# Altium PCB PCB1.PcbDoc
Units mm, origin at the board's own origin, x right, y up, seen from the top; angles counter-clockwise.
Board outline 39.37 x 36.83 mm, 4 copper layers (L1 (SIGNAL), L2 (GND), L3 (GND), L4 (SIGNAL)), stack 1.57 mm thick; 35 components, 27 nets, 174 pads, 86 vias.
Unrouted connection lines stored in the file: 5.
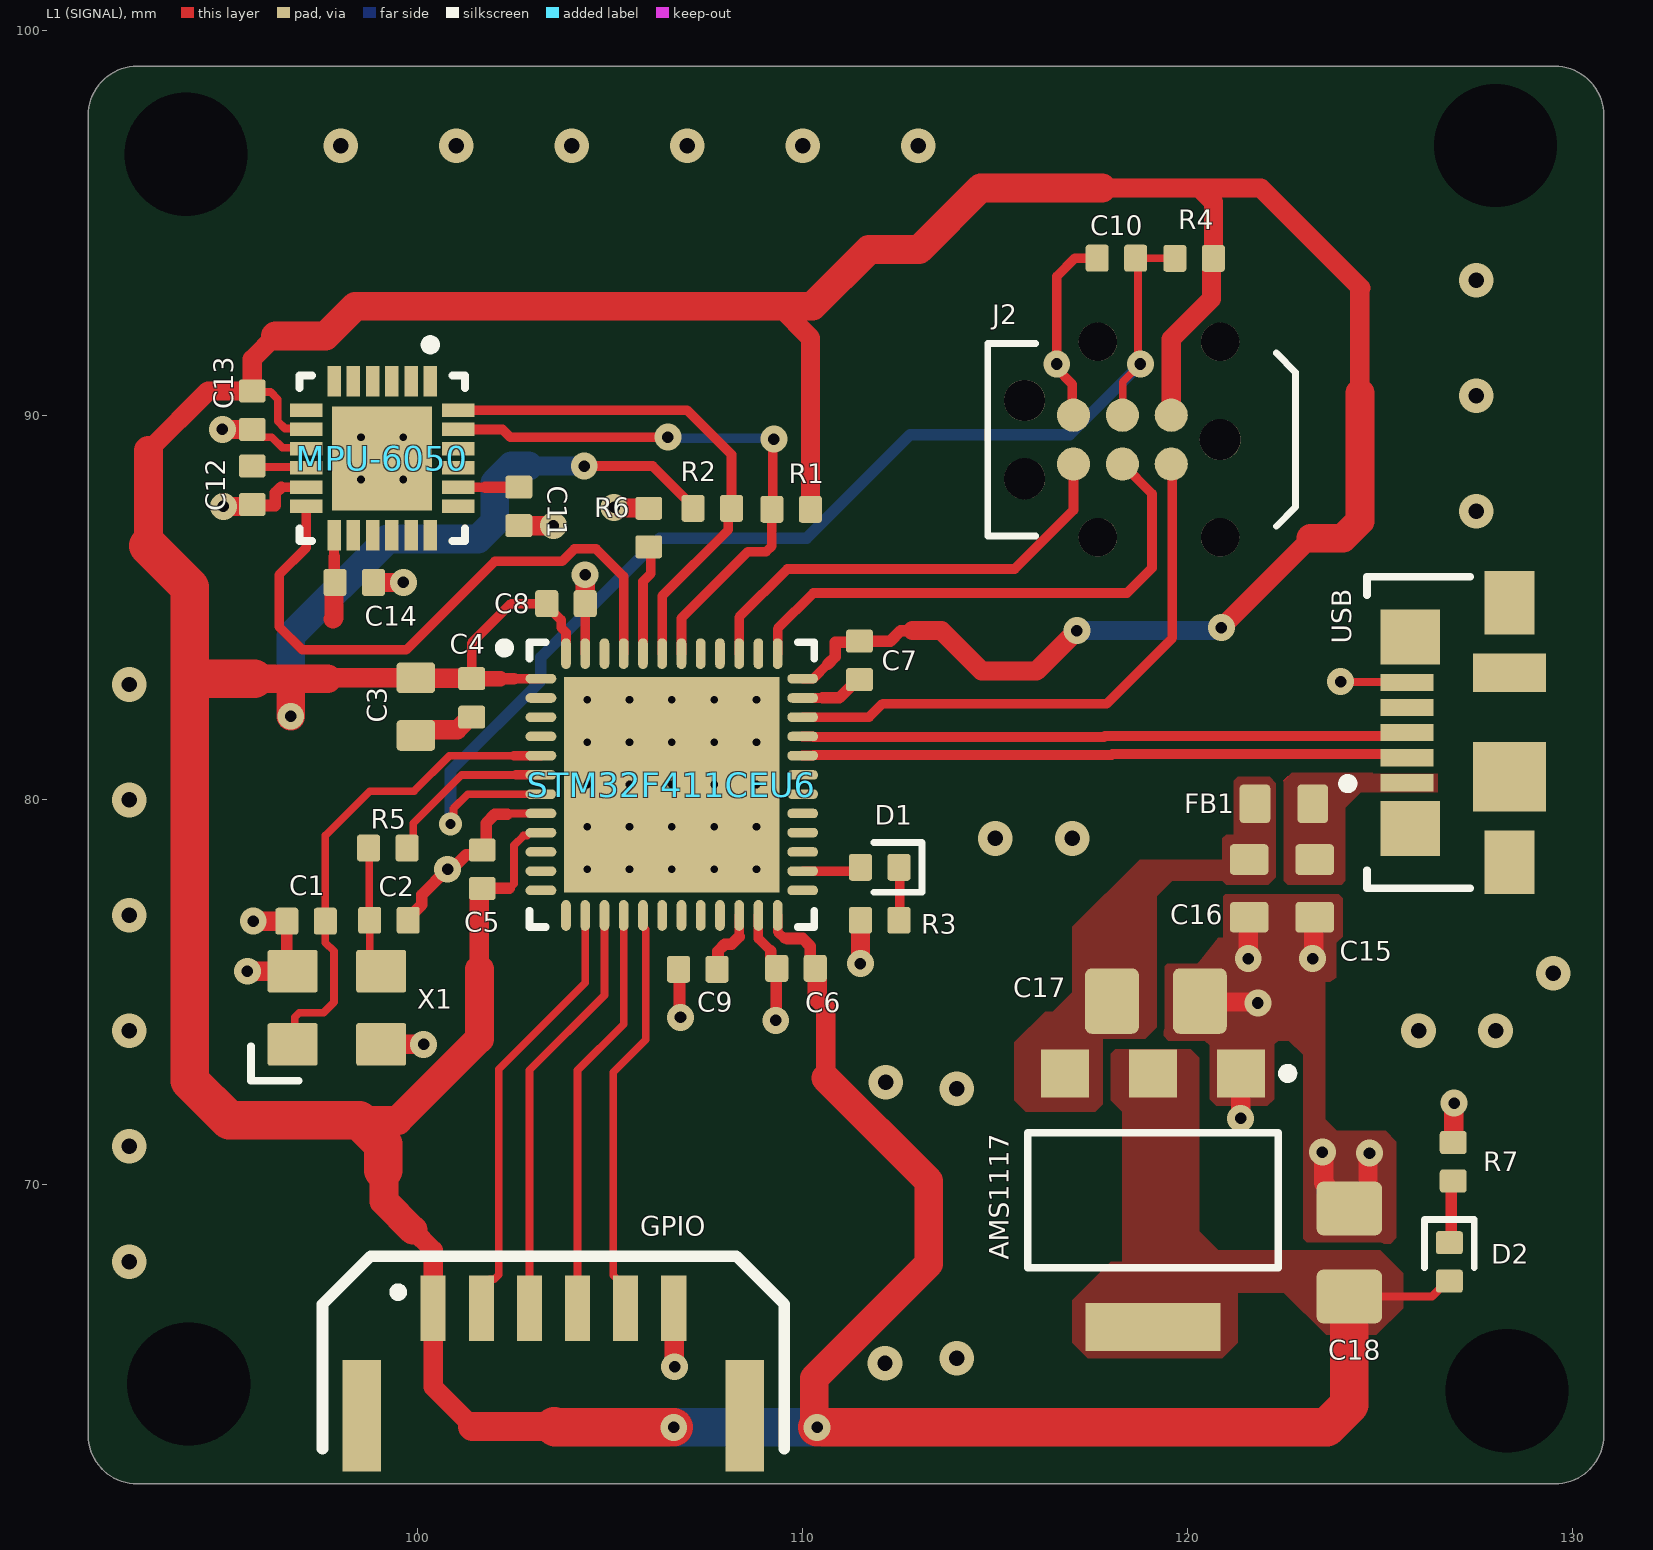
[diagram p0: L1 (SIGNAL) view]
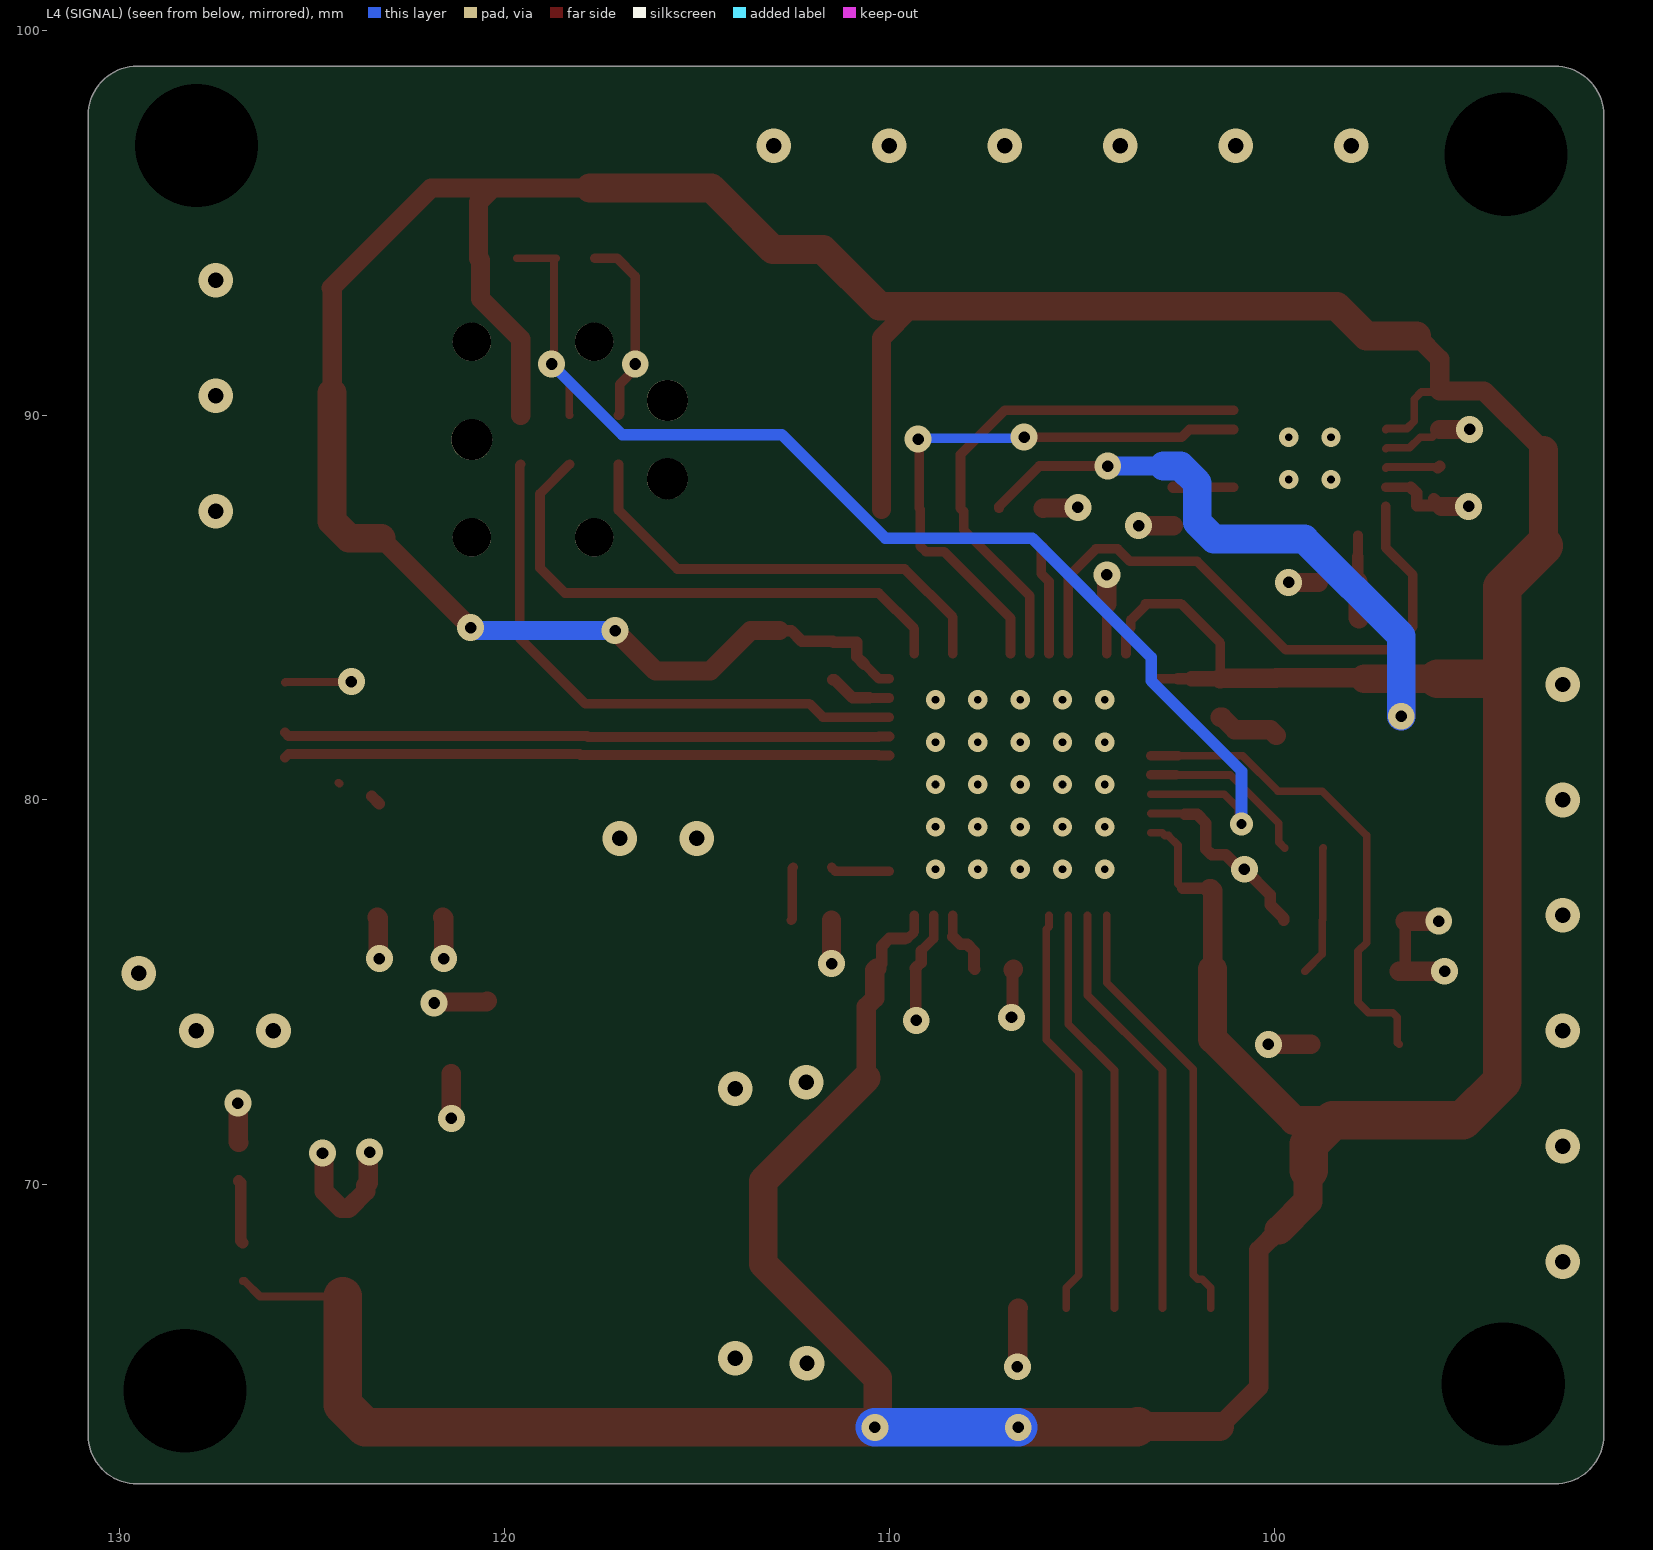
[diagram p1: L4 (SIGNAL) view, seen from below]
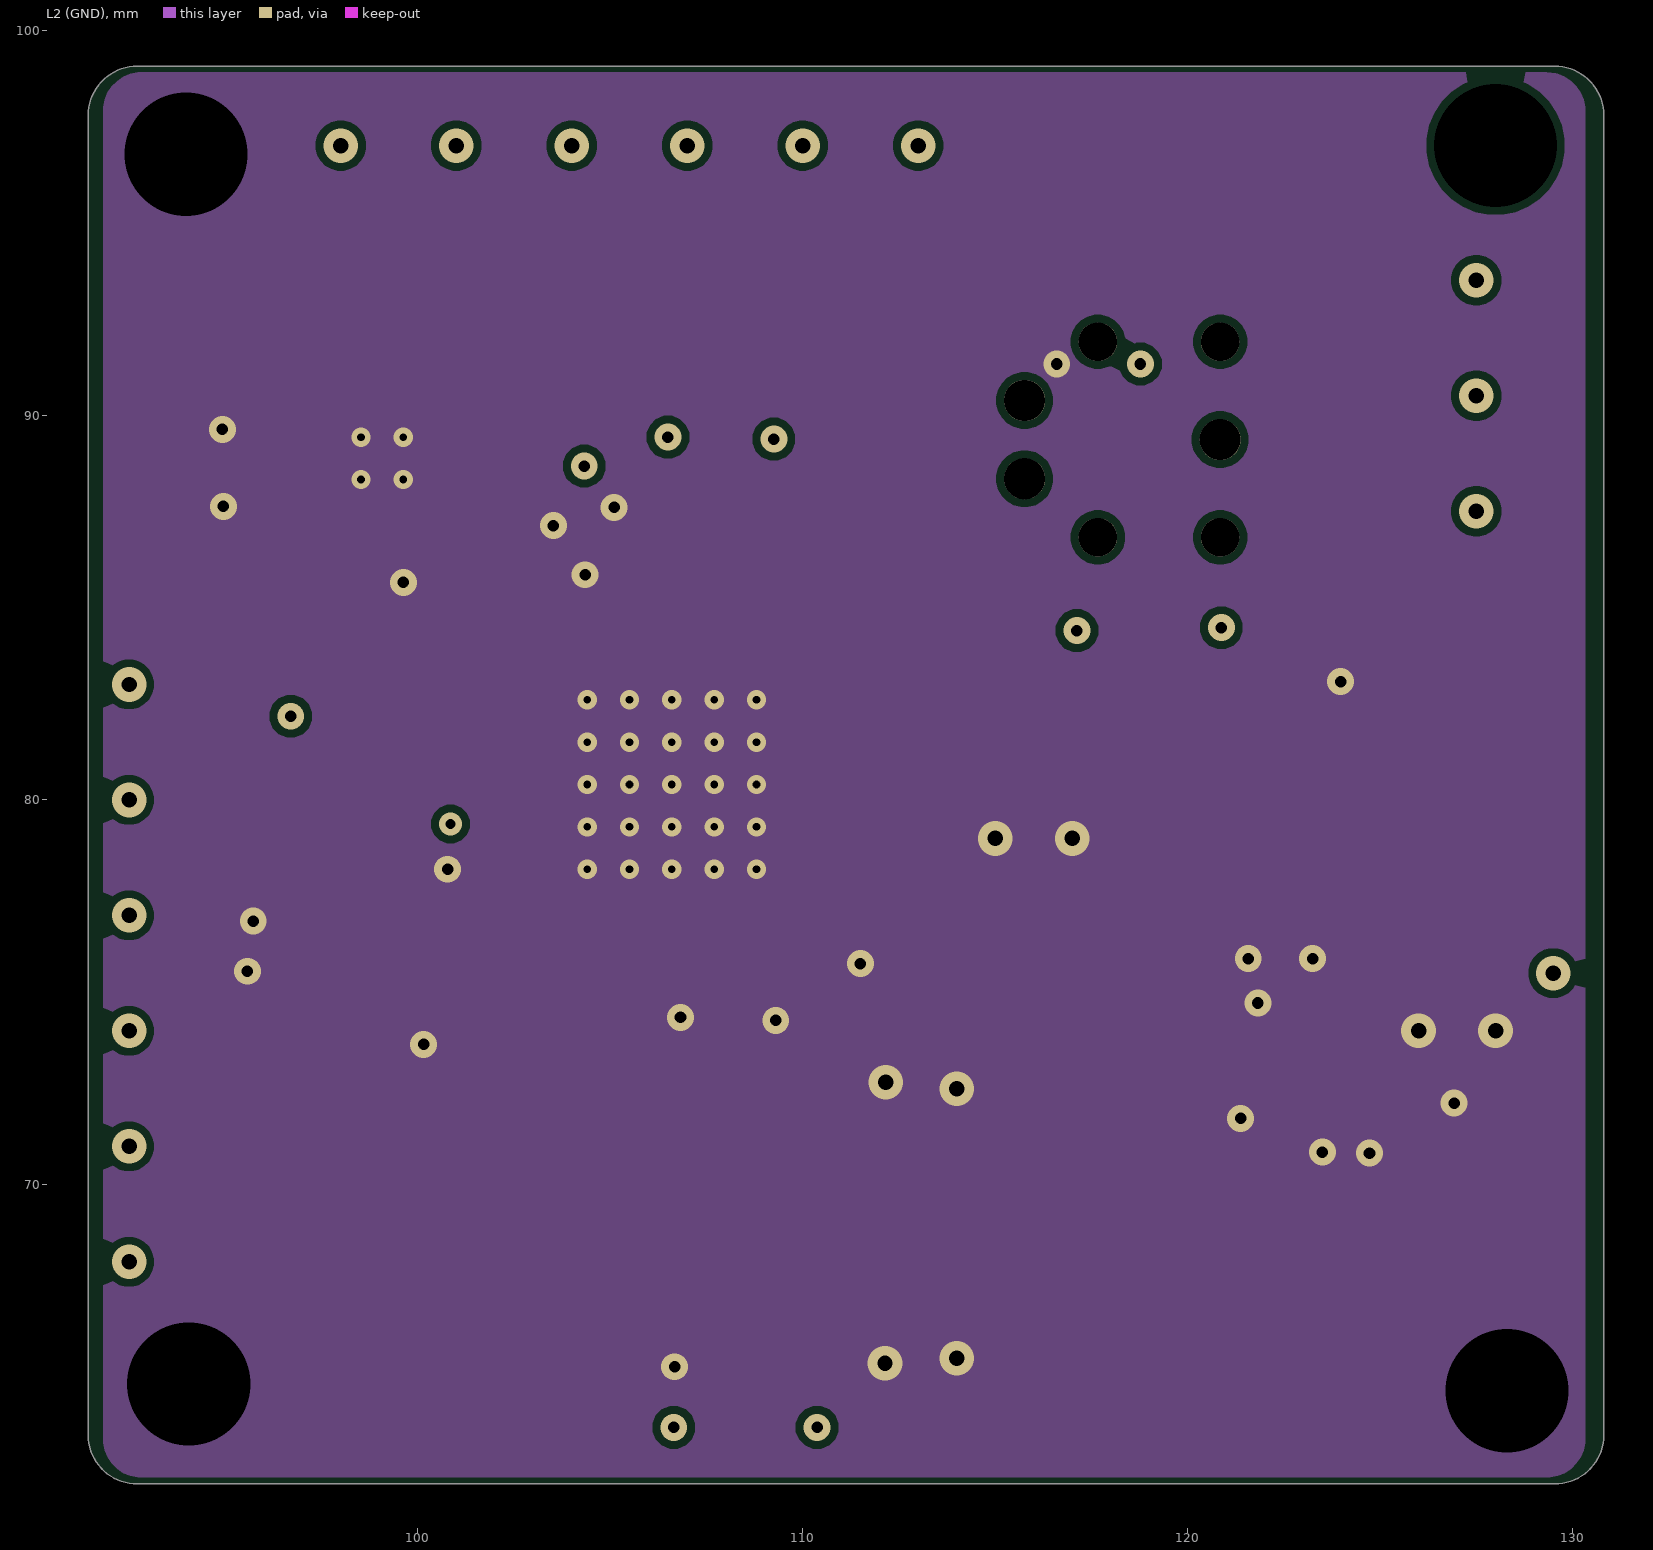
[diagram p2: L2 (GND)]
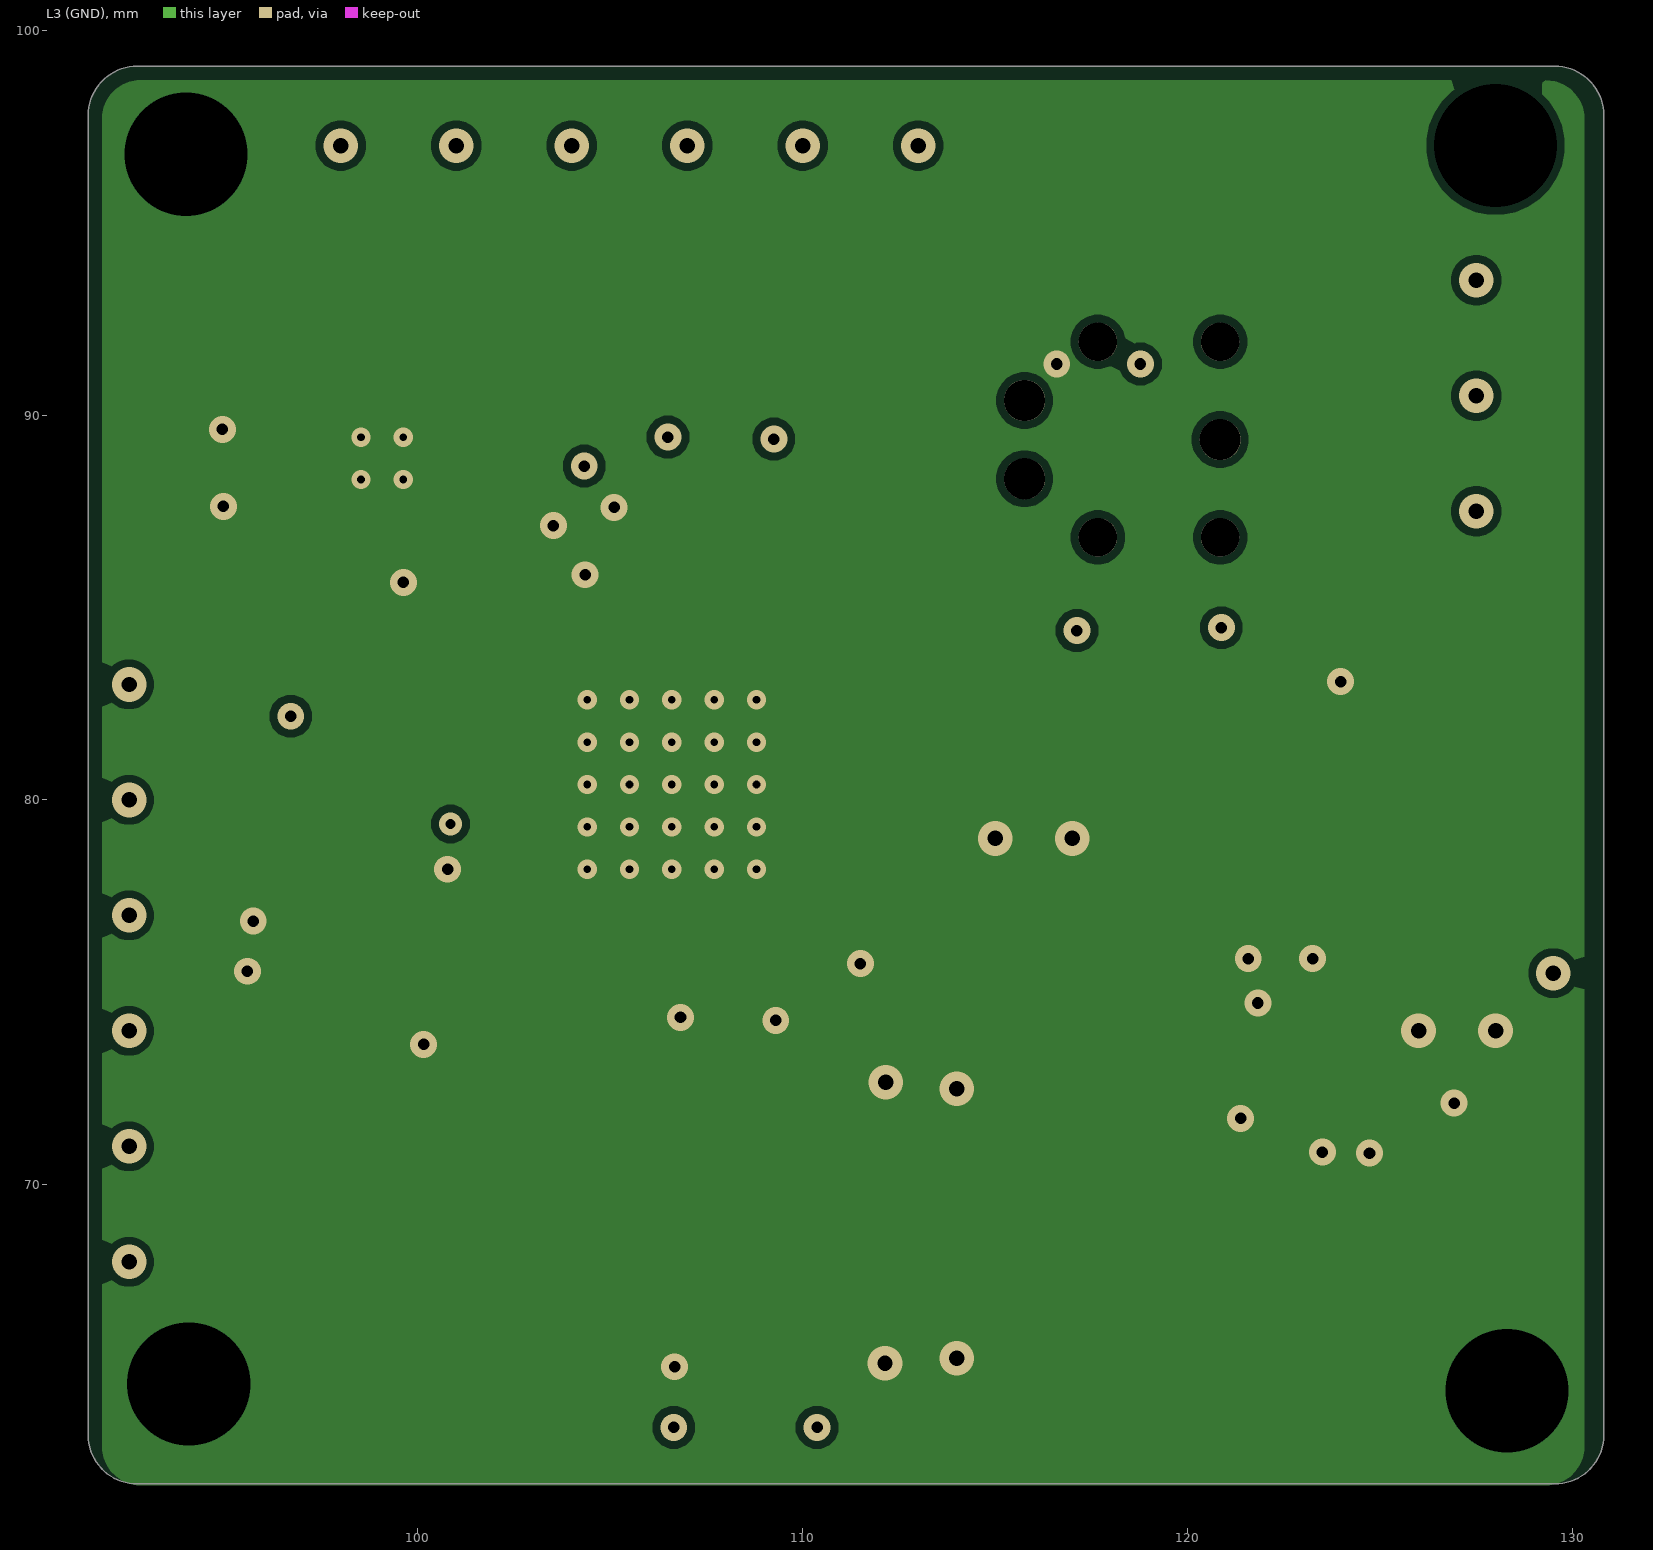
[diagram p3: L3 (GND)]
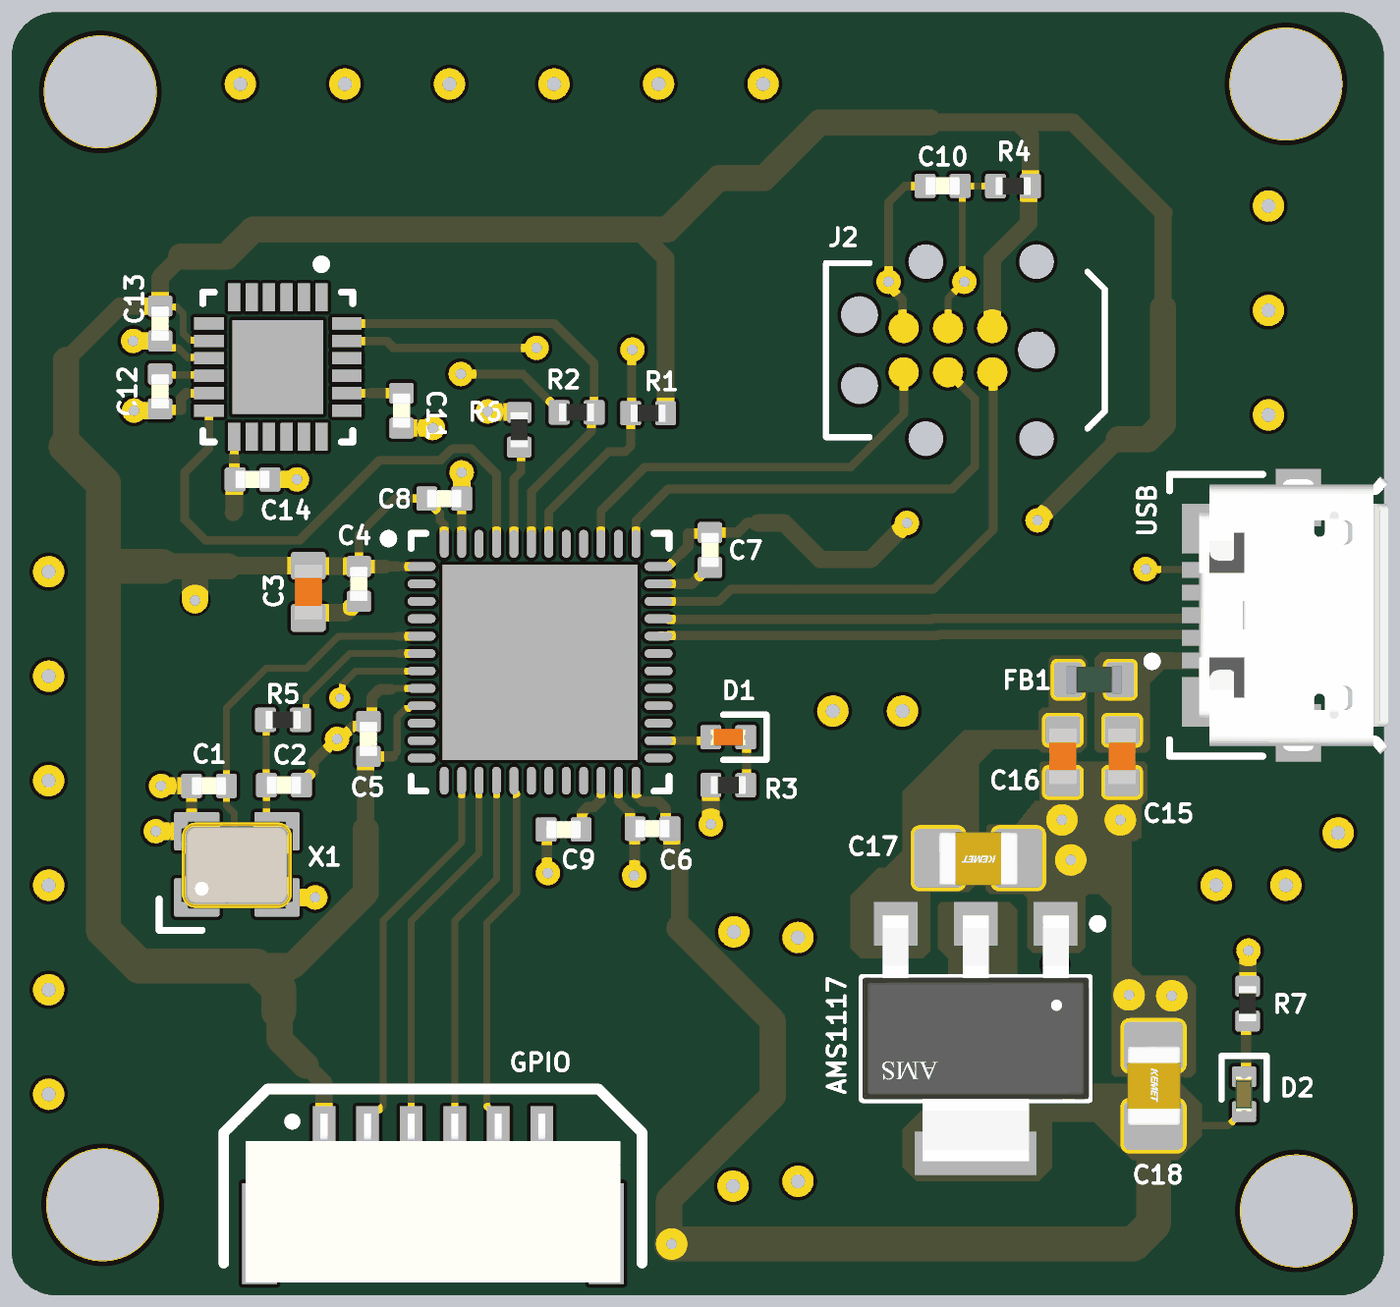
[diagram p4: 3D render of the assembled board from above, using the file's embedded part models]

## Layer stack, top to bottom
Top Solder: solder mask 0.0254, SM-001, Dk 4
L1 (SIGNAL): signal copper 0.035
Dielectric 1: prepreg 0.2, PP-017, Dk 4.6
L2 (GND): signal copper 0.0175
Dielectric 3: core 1.065, Core-039, Dk 4.6
L3 (GND): signal copper 0.0175
Dielectric 5: prepreg 0.2, PP-017, Dk 4.6
L4 (SIGNAL): signal copper 0.035
Bottom Solder: solder mask 0.0254, SM-001, Dk 4

## Board outline
91.44,63.5 91.44,97.79 cw(c92.71,97.79) 92.71,99.06 129.54,99.06 cw(c129.54,97.79) 130.81,97.79 130.81,63.5 cw(c129.54,63.5) 129.54,62.23 92.71,62.23 cw(c92.71,63.5)

## Design rules (kind name [scope] priority, off if disabled: settings)
Clearance [All] p1: gap=0.2 ignorepadtopadclearanceinfootprint=TRUE
DiffPairsRouting [All] p1: maxlimit=0.254 minlimit=0.203 mostfreqgap=0.254 toplayer_maxgap=0.203 toplayer_prefgap=0.203 toplayer_minwidth=0.26 toplayer_maxwidth=0.26 toplayer_prefwidth=0.26 bottomlayer_maxgap=0.203 bottomlayer_prefgap=0.203 bottomlayer_minwidth=0.26 bottomlayer_maxwidth=0.26 bottomlayer_prefwidth=0.26 impedanceprofiledriven=TRUE impedanceprofileid={92DA9AE8-28B3-4CBC-AF53-8A71090B6CA7} impedanceprofilevalue=90.000000 maxuncoupledlength=12.7
PolygonConnect [All] p1: connectstyle=Direct reliefconductorwidth=0.254 reliefentries=4 polygonreliefangle="90 Angle" airgapwidth=0.254
RoutingVias [All] p1: holewidth=0.3 width=0.7 viastyle="Through Hole" minholewidth=0.25 minwidth=0.55 maxholewidth=0.4 maxwidth=0.9
SolderMaskExpansion [All] p1: expansion=0.102 istentingtop=FALSE
SupplyNets "Schematic Supply Nets_4" [InNet('GND')] p1: voltage=0.000
SupplyNets "Schematic Supply Nets_3" [InNet('VBUS')] p2: voltage=0.000
SupplyNets "Schematic Supply Nets_2" [InNet('+5')] p3: voltage=0.000
SupplyNets "Schematic Supply Nets_1" [InNet('+3v3')] p4: voltage=0.000
Width [All] p1: maxlimit=1 minlimit=0.2 preferedwidth=0.3 midlayer1_minwidth=0.254 midlayer1_maxwidth=0.254 midlayer1_prefwidth=0.254 midlayer2_minwidth=0.254 midlayer2_maxwidth=0.254 midlayer2_prefwidth=0.254 minimp=50.000000 maximp=50.000000 favimp=50.000000
29 further rules are at their usual default settings.

## Classes and differential pairs
differential pair class diff90: USB_D
component class Sheet3: AMS1117 C16 C17 C18 D2 FB1 R7 USB
component class Sheet2: C11 C12 C13 C14 MPU-6050
component class Sheet1: C1 C2 C3 C4 C5 C6 C7 C8 C9 C10 D1 GPIO J2 R1 R2 R3 R4 R5 R6 STM32F411CEU6 USB X1
differential pair USB_D: +USB_D_P -USB_D_N

## Components (designator, comment, footprint, x,y, rotation, side; value= is the part's Value field where it differs from the comment)
AMS1117 "AMS1117-3.3" FP-AMS1117-IPC_C 119.1,69.6 r270 top
C1 "10pF" CAP_0402 97.1,76.85 r0 top
C2 "10pF" CAP_0402 99.25,76.875 r180 top
C3 "2.2uF" CAP_0603 99.95,82.425 r90 top
C4 "100nF" CAP_0402 101.4,82.65 r90 top
C5 "100nF" CAP_0402 101.675,78.2 r270 top
C6 "100nF" CAP_0402 109.825,75.625 r0 top
C7 "100nF" CAP_0402 111.475,83.625 r90 top
C8 "100nF" CAP_0402 103.85,85.1 r180 top
C9 "2.2uF" CAP_0402 107.275,75.6 r0 top
C10 "100nF" CAP_0402 118.15,94.075 r0 top
C11 "2.2nF" CAP_0402 102.625,87.625 r90 top
C12 "0.1uF" CAP_0402 95.7,88.175 r90 top
C13 "0.1uF" CAP_0402 95.7,90.125 r90 top
C14 "0.1uF" CAP_0402 98.35,85.65 r180 top
C15 "2.2uF" CAP_0603 123.3,77.7 r90 top
C16 "2.2uF" CAP_0603 121.6,77.7 r90 top
C17 "22uF" CAP_0805 119.175,74.775 r180 top
C18 "22uF" CAP_0805 124.2,68.243 r270 top
D1 "RED" LED_0402_RED 112,78.25 r0 top
D2 "GREEN" LED_0402_GREEN 126.8,68 r90 top
FB1 "120R" FB_0603 122.5,79.9 r180 top
GPIO "SM06B-GHS-TB" SM06B-GHS-TB 103.525,65.4 r0 top (schematic designator J1)
J2 "TC2030" TC2030-FP 118.305,89.36 r180 top
MPU-6050 "MPU-6050" IS-QFN-24_V 99.075,88.875 r270 top
R1 "2.2k" RES_0402 109.7,87.55 r0 top
R2 "2.2k" RES_0402 107.65,87.575 r180 top
R3 "1k" RES_0402 112,76.875 r0 top
R4 "10k" RES_0402 120.17,94.07 r0 top
R5 "0" RES_0402 99.225,78.75 r0 top
R6 "10k" RES_0402 106,87.075 r270 top
R7 "1k" RES_0402 126.9,70.6 r270 top
STM32F411CEU6 "STM32F411CEU6" STM-UFQFPN48_L 106.6,80.4 r0 top
USB "473460001" FP-473460001-MFG 128.01,81.75 r90 top (schematic designator J3)
X1 "24MHz" XTAL_3225 97.9,74.6 r0 top

## Footprints (in the part's own frame and the unit in brackets; to place one, negate y for a bottom-side part, rotate by r counter-clockwise, add the part's x,y. Pads: shape width x height; smd on the part's side, far side on the other; paste and mask are expansions set on the pad)
CAP_0402 [mm]
  rrect25% 0.6x0.7 smd: 1(-0.5,0) 2(0.5,0)
  body extent -0.5,-0.26 0.5,0.26, height 0.37
CAP_0603 [mm]
  rrect25% 0.8x1 smd: 1(-0.75,0) 2(0.75,0)
  body extent -0.8,-0.4 0.8,0.4, height 0.51
CAP_0805 [mm]
  rrect25% 1.4x1.7 smd: 1(-1.143,0) 2(1.143,0)
  body extent -1.15,-0.76 1.15,0.79, height 1.01
FB_0603 [mm]
  rrect25% 0.8x1 smd: 1(-0.75,0) 2(0.75,0)
  body extent -0.8,-0.4 0.8,0.4, height 0.81
FP-473460001-MFG [mm]
  rect 0.45x1.38 smd paste+0 mask+0: 1(-1.3,2.31) 2(-0.65,2.31) 3(0,2.31) 4(0.65,2.31) 5(1.3,2.31)
  rect 1.425x1.55 smd paste+0 mask+0: 6(-2.488,2.225) 7(2.488,2.225)
  rect 1.65x1.3 smd paste+0 mask+0: 8(-3.375,-0.35) 11(3.375,-0.35)
  rect 1.8x1.9 smd paste+0 mask+0: 9(-1.15,-0.35)
  rect 1x1.9 smd paste+0 mask+0: 10(1.55,-0.35)
  silkscreen extent -4.05,0.67 4.05,3.97, body extent -4.3,-2.48 4.3,3.45, height 0.25
FP-AMS1117-IPC_C [mm]
  rect 1.25x1.25 smd paste-2539.97 mask-2539.97: 1(-3.295,2.29) 2(-3.295,0) 3(-3.295,-2.29)
  rect 1.25x3.5 smd paste+0 mask+0: 4(3.295,0)
  silkscreen extent -3.42,-3.25 1.75,3.63, body extent -3.9,-3.35 3.9,3.35, height 0.25
IS-QFN-24_V [mm] "QFN, 24-Leads, Body 4x4mm, Pitch 0.5mm, Thermal Pad 2.7x2.6mm"
  rect 0.8x0.35 smd: 1(-2,1.25) 2(-2,0.75) 3(-2,0.25) 4(-2,-0.25) 5(-2,-0.75) 6(-2,-1.25) 13(2,-1.25) 14(2,-0.75) 15(2,-0.25) 16(2,0.25) 17(2,0.75) 18(2,1.25)
  rect 0.35x0.85 smd mask+0.102: 7(-1.25,-1.975) 8(-0.75,-1.975) 9(-0.25,-1.975) 10(0.25,-1.975) 11(0.75,-1.975) 12(1.25,-1.975) 19(1.25,1.975) 20(0.75,1.975) 21(0.25,1.975) 22(-0.25,1.975) 23(-0.75,1.975) 24(-1.25,1.975)
  rect 2.7x2.6 smd: 25(0,0)
  silkscreen extent -3.07,-2.15 2.15,2.15, body extent -2,-2 2,2, height 0.95
LED_0402_GREEN [mm]
  rrect25% 0.6x0.7 smd: A(-0.5,0) K(0.5,0)
  silkscreen extent -0.15,-0.65 1.1,0.65, body extent -0.51,-0.25 0.51,0.25, height 0.45
LED_0402_RED [mm]
  rrect25% 0.6x0.7 smd: A(-0.5,0) K(0.5,0)
  silkscreen extent -0.15,-0.65 1.1,0.65, body extent -0.51,-0.25 0.51,0.25, height 0.45
RES_0402 [mm]
  rrect25% 0.6x0.7 smd: 1(-0.5,0) 2(0.5,0)
  body extent -0.5,-0.25 0.5,0.25, height 0.3
SM06B-GHS-TB [mm]
  rect 0.65x1.7 smd: 1(-3.125,1.4) 2(-1.875,1.4) 3(-0.625,1.4) 4(0.625,1.4) 5(1.875,1.4) 6(3.125,1.4)
  rect 1x2.9 smd: ""(-4.975,-1.4) ""(4.975,-1.4)
  silkscreen extent -6,-2.25 6,2.75, body extent -5.38,-2.8 5.38,2.05, height 4.26
STM-UFQFPN48_L [mm] "QFN, 48-Leads, Body 7.1x7.1mm, Pitch 0.5mm, Thermal Pad 5.6x5.6mm, IPC High Density"
  oval 0.8x0.25 smd: 1(-3.4,2.75) 2(-3.4,2.25) 3(-3.4,1.75) 4(-3.4,1.25) 5(-3.4,0.75) 6(-3.4,0.25) 7(-3.4,-0.25) 8(-3.4,-0.75) 9(-3.4,-1.25) 10(-3.4,-1.75) 11(-3.4,-2.25) 12(-3.4,-2.75) 25(3.4,-2.75) 26(3.4,-2.25) 27(3.4,-1.75) 28(3.4,-1.25) 29(3.4,-0.75) 30(3.4,-0.25) 31(3.4,0.25) 32(3.4,0.75) 33(3.4,1.25) 34(3.4,1.75) 35(3.4,2.25) 36(3.4,2.75)
  oval 0.25x0.8 smd: 13(-2.75,-3.4) 14(-2.25,-3.4) 15(-1.75,-3.4) 16(-1.25,-3.4) 17(-0.75,-3.4) 18(-0.25,-3.4) 19(0.25,-3.4) 20(0.75,-3.4) 21(1.25,-3.4) 22(1.75,-3.4) 23(2.25,-3.4) 24(2.75,-3.4) 37(2.75,3.4) 38(2.25,3.4) 39(1.75,3.4) 40(1.25,3.4) 41(0.75,3.4) 42(0.25,3.4) 43(-0.25,3.4) 44(-0.75,3.4) 45(-1.25,3.4) 46(-1.75,3.4) 47(-2.25,3.4) 48(-2.75,3.4)
  rect 5.6x5.6 smd: 49(0,0)
  silkscreen extent -4.47,-3.7 3.7,3.7, body extent -3.55,-3.55 3.55,3.55, height 0.6
TC2030-FP [mm]
  round 0.863 smd paste-0.432: 1(-1.27,-0.635) 2(-1.27,0.635) 3(0,-0.635) 4(0,0.635) 5(1.27,-0.635) 6(1.27,0.635)
  round 1 hole 1 unplated: MH(-2.54,2.54) MH(-2.54,-2.54) MH(0.635,2.54) MH(0.635,-2.54)
  round 1.067 hole 1.067 unplated: MH(-2.54,0) MH(2.54,-1.016) MH(2.54,1.016)
  silkscreen extent -4.5,-2.5 3.5,2.5
XTAL_3225 [mm]
  rrect10% 1.3x1.1 smd: 1(-1.15,-0.95) 2(1.15,-0.95) 3(1.15,0.95) 4(-1.15,0.95)
  silkscreen extent -2.23,-1.89 -1,-1, body extent -1.6,-1.28 1.6,1.22, height 0.61

## Part data
AMS1117: library part CMP-209535-000001-1, "LDO Voltage Regulators 1A, 3.3V", Dropout Voltage=1.1V, Manufacturer="Advanced Monolithic Systems", Max Junction Temp=+125°C, Max Power Dissipation=1.2W, Max Supply Voltage=15V, Nominal Supply Current=5mA, Output Current=1A, Output Voltage=3.3V, Package=AMS1117, Temperature="-40°C to +125°C", Temperature Range Low=-40°C, Automotive=No, Category=IC, ComponentLink2Description=Datasheet, ComponentLink2URL=http://www.advanced-monolithic.com/pdf/ds1117.pdf, Device Class L1="Integrated Circuits (ICs)", Device Class L2="Power Management ICs", Device Class L3="Voltage Regulators - Linear", Height=1.8mm, Ipc Land Pattern Name=SOT229P700X180-4, Lead Free=Yes, Manufacturer Part Number=AMS1117-3.3, Number Of Outputs=1, Octopart=https://octopart.com/ams1117-3.3-advanced+monolithic+systems-25899300, Output Type=Fixed, RoHS=TRUE, Standoff Height=0.64mm, Temperature Range High=+125°C
C1 C2 C4 C5 C6 C7 C8 C9 C10 C11 C12 C13 C14: library part CAP_0402, "Capacitor SMD 0402"
C3 C15 C16: library part CAP_0603, "Capacitor SMD 0603"
C17 C18: library part CAP_0805, "Capacitor SMD 0805"
D1: library part LED_0402_RED, "LED 0402 RED SMD"
D2: library part LED_0402_GREEN, "LED 0402 GREEN SMD"
FB1: library part FB_0603, "Ferrite Bead SMD 0603"
GPIO: "Header Connector 6 Position 1.25MM Pitch SMD Horizontal JST GH", Manufacturer=JST, Manufacturer Part Number=SM06B-GHS-TB
J2: library part TC2030-NL, "Tag-Connect No-Solder SWD Debug Connector (No Legs) DO NOT PLACE", Manufacturer=Tag-Connect, Manufacturer Part Number=TC2030
MPU-6050: library part CMP-1753-00002-2, "3-Axis Gyroscope, Accelerometer and a Digital Motion Processor(TM) (DMP), 2.375 to 3.46 V, -40 to 85 degC, 24-Pin QFN, RoHS, Tape and Reel", Manufacturer=InvenSense, Standard Package=5,000, Category=Sensors,Transducers, Datasheet URL=http://datasheet.octopart.com/MPU-6050-InvenSense-datasheet-14421344.pdf, Datasheet Version="Rev. 3.3, 05/2012", Dynamic Catalog=MPU-6000™Series, Family=Multifunction, Featured Product=MPU-60506-Axis,IntegratedI²CSolution, Manufacturer URL=http://www.invensense.com/, Online Catalog=MPU-6000™Series, Other Names="1428-1007-2 / MPU6050", Output Type=Digital, Sensor Type=MotionTracking, Unit PriceUSD=Digital
R1 R2 R3 R4 R5 R6 R7: library part RES_0402, "Resistor SMD 0402"
STM32F411CEU6: library part CMP-0243-00165-1, "ARM Cortex-M4 32-bit MCU+FPU, 512 KB Flash, 128 KB RAM, 36 I/Os, 48-Pin UFQFPN, -40 to 85 degC, Tray", I/Os (High Current)=36, Operating Frequency(F) (Processor speed) (MHz)=100, Package Description=UFQFPN48, Package Reference="48-Pin Ultra Thin Fine Pitch Quad Flat No-Lead, 7 x 7 x 0.6 mm Body, 0.5 mm Pitch, Exposed Pad", Supply Voltage(Vcc) min (V)=1.7, componentlink1description="Manufacturer URL", componentlink1url=http://www.st.com/, ComponentLink2Description=Datasheet, ComponentLink2URL=http://www.st.com/st-web-ui/static/active/en/resource/technical/document/datasheet/DM00115249.pdf, Core="ARM Cortex-M4", DatasheetVersion="Rev. 6", FLASH Size (Prog) (kB)=512, Internal RAM Size (kB)=128, Mounting Technology="Surface Mount", Packing=Tray
USB: library part CMP-2000-05246-2, "CONN RCPT USB2.0 MICRO B SMD R/A", Current Rating=1.8A, Manufacturer=Molex, Package=0, Temperature="-30°C to +85°C", Temperature Range High=+85°C, Temperature Range Low=-30°C, Voltage Rating=30V, Automotive=No, Category=Conn, ComponentLink2Description=Datasheet, ComponentLink2URL=https://www.molex.com/webdocs/datasheets/pdf/en-us/0473460001_IO_CONNECTORS.pdf, Conn Orientation="Right Angle", Contact Material=Gold,Nickel, Device Class L1=Connectors, Device Class L2="USB Connectors", Device Class L3=unset, Digikey Description="CONN RCPT USB2.0 MICRO B SMD R/A", Footprint Url=https://www.molex.com/pdm_docs/sd/473460001_sd.pdf, Height=2.945mm, Is Female=yes, Lead Free=Yes, Manufacturer Part Number=473460001, Number Of Contacts=5, Octopart=https://octopart.com/47346-0001-molex-7164928, Pitch=0.65mm, RoHS=TRUE, Shielding=true, Usb Standard="USB 2.0"
X1: library part TSX-3225_24.0000MF15X-AC, "Crystal SMD 24MHz 10PPM 7pF 3225", Manufacturer=Epson, Manufacturer Part Number="TSX-3225 24.0000MF15X-AC"

## Free pads (board coordinates)
  round 1.524 hole 3.2 mask+1: H1(93.98,96.774) H1(94.05,64.825) H1(128,97) H1(128.3,64.65)

## Via types
v1: diameter 0.7, hole 0.3, L1 (SIGNAL) to L4 (SIGNAL), 31 vias
v2: diameter 0.5, hole 0.2, L1 (SIGNAL) to L4 (SIGNAL), 29 vias
v3: diameter 0.9, hole 0.4, L1 (SIGNAL) to L4 (SIGNAL), 24 vias
v4: diameter 0.7/0.7/0.7/0.7 (per signal layer), hole 0.3, L1 (SIGNAL) to L4 (SIGNAL), 1 vias
v5: diameter 0.6, hole 0.25, L1 (SIGNAL) to L4 (SIGNAL), 1 vias

## Nets (pads, with @x,y where several pads share a name; then routed paths per layer and width w, separated by ;. In a path a pad name is that pad's centre, name@x,y a point inside that pad or via, vN(x,y) a via of type N, cw(c..) or ccw(c..) an arc to the next point about the centre after c; other vN are vias at no path point)
+3v3: AMS1117.2 AMS1117.4 C3.2 C4.2 C5.2 C6.2 C7.2 C8.2 C13.2 C14.2 C18.2 D2.A GPIO.1 J2.1 MPU-6050.8 MPU-6050.13 R1.2 R2.2 R4.2 STM32F411CEU6.1 STM32F411CEU6.9 STM32F411CEU6.24 STM32F411CEU6.36 STM32F411CEU6.48 | length 192.6
  L1 (SIGNAL) w0.2: C13.2 95.725,90.6 96.175,90.6 96.363,90.412 96.363,89.838 96.551,89.65 97.075,89.65 MPU-6050.8 ; 102.375,77.7 102.5,77.825 102.5,78.826 102.749,79.075 102.836,79.075 102.911,79.15 STM32F411CEU6.9 ; C18.2 126.35,67.1 126.75,67.5 D2.A
  L1 (SIGNAL) w0.25: 97.825,86.325 MPU-6050.13 ; C4.2 101.4,84.075 102.425,85.1 C8.2 ; 102.5,83.15 STM32F411CEU6.1 ; C8.2@103.35,85.05 103.725,84.675 103.725,84.475 103.85,84.35 STM32F411CEU6.48 ; v1(104.325,88.675) 106.1,88.675 107.15,87.625 R2.2 ; STM32F411CEU6.24 109.35,76.572 109.522,76.4 109.6,76.4 ; STM32F411CEU6.36 110.275,83.15 110.65,83.525
  L1 (SIGNAL) w0.3: C14.2@97.825,85.675 97.825,86.325 ; C5.2 102.375,77.7 ; 102.15,83.15 102.5,83.15 ; 109.6,76.4 110,76.4 110.2,76.2 110.2,75.75 C6.2 ; 110.65,83.525 110.85,83.725 110.85,84.1 111.45,84.1 C7.2 112.275,84.125 112.55,84.4 112.85,84.4
  L1 (SIGNAL) w0.4: C4.2 102.15,83.15
  L1 (SIGNAL) w0.5: 93,89.075 94.55,90.625 C13.2 95.7,91.45 96.3,92.05 ; 97.65,83.15 97.675,83.175 C3.2 99.963,83.162 101.388,83.162 C4.2 ; 97.8,84.7 97.825,84.725 C14.2@97.825,85.675 ; 99.875,68.825 100.4,68.3 GPIO.1 100.4,64.75 101.425,63.725 ; 101.6,75.6 101.6,77.65 101.65,77.7 C5.2 ; 109.375,92.825 110.2,92 R1.2 ; C6.2 110.375,75.575 110.375,74.85 110.6,74.625 110.6,72.775 ; 112.85,84.4 113.6,84.4 114.65,83.35 116.075,83.35 v1(117.125,84.4) ; 117.775,95.9 120.3,95.9 ; J2.1 119.575,91.974 120.62,93.019 120.62,94.02 R4.2 120.67,95.53 120.3,95.9 ; v1(120.875,84.475) 123.2,86.8 ; 124.475,90.575 124.475,93.275 124.5,93.3 121.9,95.9 120.3,95.9
  L1 (SIGNAL) w0.75: 93,86.6 93,89.075 ; 95.75,83.15 96.7,83.15 ; 96.3,92.05 97.6,92.05 98.375,92.825 109.375,92.825 110.25,92.825 111.725,94.3 113.025,94.3 114.625,95.9 117.775,95.9 ; v1(96.7,82.175) 96.7,83.15 ; 97.65,83.15 96.7,83.15 ; 98.475,71.675 99.483,71.675 101.6,73.792 101.6,75.6 ; 99.1,70.375 99.125,70.35 99.125,69.575 99.875,68.825 ; 101.425,63.725 103.55,63.725 ; v1(110.375,63.7) 110.3,63.775 110.3,64.975 113.275,67.95 113.275,70.1 110.6,72.775 ; 123.2,86.8 124.036,86.8 124.475,87.239 124.475,90.575
  L1 (SIGNAL) w1: 93,86.6 94.075,85.525 94.075,83.15 ; 95.75,83.15 94.075,83.15 ; 99.1,70.375 99.1,71.05 98.475,71.675 95.1,71.675 94.075,72.7 94.075,83.15 ; 103.55,63.725 103.575,63.7 v1(106.65,63.7) ; v1(110.375,63.7) 123.614,63.7 124.2,64.286 C18.2
  L4 (SIGNAL) w0.5: 102.875,88.675 v1(104.325,88.675) ; v1(117.125,84.4) 120.746,84.4 120.821,84.475 v1(120.875,84.475)
  L4 (SIGNAL) w0.75: v1(96.7,82.175) 96.7,84.261 99.214,86.775 101.561,86.775 102,87.214 102,88.236 102.439,88.675 102.875,88.675
  L4 (SIGNAL) w1: v1(106.65,63.7) v1(110.375,63.7)
+5: AMS1117.3 C16.2 C17.2 FB1.2
GND: AMS1117.1 C1.1 C2.1 C3.1 C4.1 C5.1 C6.1 C7.1 C8.1 C9.1 C10.1 C11.1 C12.1 C13.1 C14.1 C15.1 C16.1 C17.1 C18.1 GPIO.6 J2.5 MPU-6050.1 MPU-6050.9 MPU-6050.11 MPU-6050.18 MPU-6050.25 pad.H1@93.98,96.774 pad.H1@94.05,64.825 pad.H1@128.3,64.65 R3.1 R6.1 R7.1 STM32F411CEU6.8 STM32F411CEU6.23 STM32F411CEU6.35 STM32F411CEU6.47 STM32F411CEU6.49 USB.5 X1.2 X1.4 | length 45.8
  L1 (SIGNAL) w0.2: C13.1 95.9,89.425 96.21,89.425 96.485,89.15 97.075,89.15 MPU-6050.9 ; 102.325,79.625 102.35,79.65 STM32F411CEU6.8 ; v1(123.975,83.075) 123.987,83.063 125.688,83.063 USB.5
  L1 (SIGNAL) w0.25: 96.45,88.125 MPU-6050.11 ; STM32F411CEU6.47 C8.1 ; STM32F411CEU6.23 108.85,76.4 109.175,76.075 ; STM32F411CEU6.35 110.525,82.65 ; J2.5 117.002,90.028 117.002,90.801 116.6,91.203 v1(116.6,91.325) 116.6,93.6 117.075,94.075 C10.1
  L1 (SIGNAL) w0.3: C12.1@95.65,87.625 ccw(c95.65,87.675) C12.1 ; C12.1@95.85,87.825 C12.1 ; 96.45,88.125 96.3,87.975 96.3,87.65 95.725,87.65 C12.1 ; C1.1 96.6,75.7 X1.4 ; C2.1 99.75,76.925 100.1,77.275 100.1,77.531 100.769,78.2 100.883,78.2 101.258,78.575 101.625,78.575 101.775,78.725 101.775,79.4 102,79.625 102.325,79.625 ; C9.1@106.788,75.587 106.8,75.575 106.8,74.375 v1(106.825,74.35) ; 109.175,76.075 109.175,75.775 C6.1 109.313,75.613 109.313,74.288 v1(109.3,74.275) ; 110.525,82.65 110.95,82.65 111.425,83.125 C7.1
  L1 (SIGNAL) w0.5: v1(94.925,89.625) C13.1 ; v4(94.95,87.625) C12.1@95.65,87.625 ; v1(95.575,75.55) X1.4 ; v1(95.725,76.85) C1.1 ; C14.1 v1(99.625,85.65) ; X1.2 v1(100.15,73.65) ; C3.1 100.1,81.825 101.025,81.825 101.35,82.15 C4.1 ; C11.1 v1(103.525,87.125) ; C8.1 v1(104.35,85.85) ; v1(105.1,87.6) 105.113,87.587 105.987,87.587 R6.1 ; GPIO.6 106.662,66.787 106.662,65.287 v1(106.675,65.275) ; C9.1 C9.1@106.788,75.587 ; v1(111.5,75.75) R3.1 ; C17.1@120.443,74.775 120.468,74.75 121.8,74.75 v1(121.825,74.725) ; v1(121.375,71.725) 121.383,71.733 121.383,72.887 AMS1117.1 ; v1(121.575,75.875) 121.575,76.925 C16.1 ; v1(123.25,75.875) 123.275,75.9 123.275,76.925 C15.1 ; v1(123.5,70.85) 123.538,70.812 123.538,70.048 123.6,69.986 123.6,69.836 124.05,69.386 C18.1 124.237,69.386 124.687,69.836 124.687,70.787 v1(124.725,70.825) ; R7.1 126.912,71.112 126.912,72.112 v1(126.925,72.125)
  other v1: 100.775,78.2
  other v2: 104.4,78.2 105.5,78.2 106.6,78.2 107.7,78.2 108.8,78.2 104.4,79.3 105.5,79.3 106.6,79.3 107.7,79.3 108.8,79.3 104.4,80.4 105.5,80.4 106.6,80.4 107.7,80.4 108.8,80.4 104.4,81.5 105.5,81.5 106.6,81.5 107.7,81.5 108.8,81.5 104.4,82.6 105.5,82.6 106.6,82.6 107.7,82.6 108.8,82.6 98.525,88.325 99.625,88.325 98.525,89.425 99.625,89.425
  other v3: 112.137,65.363 114,65.5 114,72.5 112.162,72.662 126,74 128,74 115,79 117,79
"IMU REGOUT": C12.2 MPU-6050.10 | length 1.5
  L1 (SIGNAL) w0.2: C12.2 95.725,88.65 97.075,88.65 MPU-6050.10
  L1 (SIGNAL) w0.3: C12.2 C12.2@95.75,88.625
IMU_CPUOUT: C11.2 MPU-6050.20 | length 1.6
  L1 (SIGNAL) w0.25: MPU-6050.20 101.75,88.125
  L1 (SIGNAL) w0.3: 101.75,88.125 C11.2
IMU_INT: MPU-6050.12 STM32F411CEU6.45 | length 16
  L1 (SIGNAL) w0.25: MPU-6050.12 97.1,86.55 96.4,85.85 96.4,84.5 97,83.9 99.7,83.9 102,86.2 103.745,86.2 104.07,86.525 104.63,86.525 105.35,85.805 STM32F411CEU6.45
IMU_SCL: MPU-6050.23 R1.1 STM32F411CEU6.42 | length 15.2
  L1 (SIGNAL) w0.25: MPU-6050.23 102.2,89.625 102.4,89.425 v1(106.5,89.425) ; STM32F411CEU6.42 106.85,84.725 108.575,86.45 109.054,86.45 109.2,86.596 R1.1 109.225,87.575 109.225,89.35 v1(109.25,89.375)
  L4 (SIGNAL) w0.25: v1(106.5,89.425) 106.525,89.4 109.225,89.4 v1(109.25,89.375)
IMU_SDA: MPU-6050.24 R2.1 STM32F411CEU6.43 | length 13.5
  L1 (SIGNAL) w0.25: MPU-6050.24 107,90.125 108.15,88.975 R2.1 108.069,87.494 108.069,87.019 106.35,85.3 STM32F411CEU6.43
LED_PWR_K: D2.K R7.2 | length 1.6
  L1 (SIGNAL) w0.3: D2.K 126.85,68.55 126.85,70.05 R7.2
"MCU BOOT0": R6.2 STM32F411CEU6.44 | length 2.9
  L1 (SIGNAL) w0.25: STM32F411CEU6.44 105.85,85.675 106.05,85.875 106.05,86.525 R6.2
"MCU NRST": C10.2 J2.3 R4.1 STM32F411CEU6.7 | length 32.2
  L1 (SIGNAL) w0.2: v5(100.85,79.375) 100.927,79.452 100.927,79.777 101.3,80.15 STM32F411CEU6.7 ; J2.3 118.312,90.002 118.312,90.862 v1(118.775,91.325) 118.712,91.388 118.712,94.013 C10.2@118.653,94.072 ; C10.2 C10.2@118.653,94.072 ; R4.1 119.667,94.072 C10.2@118.653,94.072
  L4 (SIGNAL) w0.3: v5(100.85,79.375) 100.85,80.75 103.2,83.1 103.2,83.71 106.29,86.8 110.1,86.8 112.793,89.493 116.943,89.493 v1(118.775,91.325)
"MCU OSC IN": C1.2 STM32F411CEU6.5 X1.1 | length 12.8
  L1 (SIGNAL) w0.2: X1.1 96.8,73.7 96.8,74.35 96.925,74.475 97.55,74.475 97.825,74.75 97.825,76.067 97.6,76.292 C1.2 97.6,79.075 98.75,80.225 99.9,80.225 100.825,81.15 102.5,81.15
  L1 (SIGNAL) w0.25: 102.5,81.15 STM32F411CEU6.5
"MCU OSC OUT": R5.2 STM32F411CEU6.6 | length 4.5
  L1 (SIGNAL) w0.2: R5.2 99.883,78.908 99.883,79.391 101.142,80.65 102.55,80.65
  L1 (SIGNAL) w0.25: 102.55,80.65 STM32F411CEU6.6
"MCU VCAP": C9.2 STM32F411CEU6.22 | length 1.7
  L1 (SIGNAL) w0.25: 108.35,76.45 STM32F411CEU6.22
  L1 (SIGNAL) w0.3: C9.2 107.8,75.625 107.8,76.074 107.976,76.25 108.15,76.25 108.35,76.45
MCU_LED_A: D1.A STM32F411CEU6.26 | length 1.5
  L1 (SIGNAL) w0.25: STM32F411CEU6.26 111.4,78.15 D1.A
MCU_PA4: GPIO.2 STM32F411CEU6.14 | length 11.4
  L1 (SIGNAL) w0.2: GPIO.2 101.65,67.325 101.875,67.55 101.983,67.55 102.1,67.667 102.1,73 104.35,75.25 STM32F411CEU6.14
MCU_PA5: GPIO.3 STM32F411CEU6.15 | length 11
  L1 (SIGNAL) w0.2: GPIO.3 102.9,72.979 104.85,74.929 STM32F411CEU6.15
MCU_PA6: GPIO.4 STM32F411CEU6.16 | length 10.7
  L1 (SIGNAL) w0.2: GPIO.4 104.15,72.975 105.35,74.175 STM32F411CEU6.16
MCU_PA7: GPIO.5 STM32F411CEU6.17 | length 10.7
  L1 (SIGNAL) w0.2: GPIO.5 105.4,67.325 105.075,67.65 105.075,72.925 105.925,73.775 105.925,76.636 105.85,76.711 STM32F411CEU6.17
MCU_SWCLK: J2.4 STM32F411CEU6.37 | length 14
  L1 (SIGNAL) w0.25: STM32F411CEU6.37 109.35,84.45 110.275,85.375 118.425,85.375 119.075,86.025 119.075,87.955 J2.4
MCU_SWDIO: J2.2 STM32F411CEU6.34 | length 15
  L1 (SIGNAL) w0.25: STM32F411CEU6.34 111.725,82.15 112.075,82.5 117.9,82.5 119.6,84.2 119.6,88.7 J2.2
MCU_SWO: J2.6 STM32F411CEU6.39 | length 12
  L1 (SIGNAL) w0.25: STM32F411CEU6.39 108.35,84.75 109.6,86 115.508,86 117.035,87.527 J2.6
NetD1_K: D1.K R3.2 | length 1.4
  L1 (SIGNAL) w0.25: D1.K 112.525,78.225 112.525,76.9 R3.2@112.55,76.875
USB_D_N: STM32F411CEU6.32 USB.2 | length 15.8
  L1 (SIGNAL) w0.26: STM32F411CEU6.32 110.265,81.15 110.283,81.168 118.023,81.168 118.048,81.193 125.607,81.193 USB.2
USB_D_P: STM32F411CEU6.33 USB.3 | length 15.8
  L1 (SIGNAL) w0.26: STM32F411CEU6.33 110.265,81.65 110.283,81.632 117.831,81.632 117.856,81.657 125.607,81.657 USB.3
VBUS: C15.2 FB1.1 USB.1 | length 0.3
  L1 (SIGNAL) w0.2: 124.285,80.425 124.31,80.45
  L1 (SIGNAL) w0.3: FB1.1 FB1.1@123.45,80.1
"XTAL IN": C2.2 R5.1 X1.3 | length 3.4
  L1 (SIGNAL) w0.2: R5.1 98.738,78.737 98.738,76.887 C2.2 98.75,76 X1.3@99.2,75.55
pads on no net: GPIO. J2.MH MPU-6050.2 MPU-6050.3 MPU-6050.4 MPU-6050.5 MPU-6050.6 MPU-6050.7 MPU-6050.14 MPU-6050.15 MPU-6050.16 MPU-6050.17 MPU-6050.19 MPU-6050.21 MPU-6050.22 STM32F411CEU6.2 STM32F411CEU6.3 STM32F411CEU6.4 STM32F411CEU6.10 STM32F411CEU6.11 STM32F411CEU6.12 STM32F411CEU6.13 STM32F411CEU6.18 STM32F411CEU6.19 STM32F411CEU6.20 STM32F411CEU6.21 STM32F411CEU6.25 STM32F411CEU6.27 STM32F411CEU6.28 STM32F411CEU6.29 STM32F411CEU6.30 STM32F411CEU6.31 STM32F411CEU6.38 STM32F411CEU6.40 STM32F411CEU6.41 STM32F411CEU6.46 USB.4 USB.6 USB.7 USB.8 USB.9 USB.10 USB.11
copper on no net:
  other v3: 92.5,68 92.5,71 92.5,74 129.5,75.5 92.5,77 92.5,80 92.5,83 127.5,87.5 127.5,90.5 127.5,93.5 98,97 101,97 104,97 107,97 110,97 113,97

## Polygon pours and split planes (outlines as drawn)
GND on L1 (SIGNAL) "GND_L01_P019" (solid, pour order 19): 120.45,73.75 120.575,73.625 120.575,72.225 120.75,72.05 122.075,72.05 122.25,72.225 122.25,73.65 122.35,73.75 122.625,73.75 123,73.375 123,68.6 123.125,68.475 125.275,68.475 125.425,68.625 125.425,71.125 125.15,71.4 123.875,71.4 123.575,71.7 123.575,75.275 123.775,75.275 123.875,75.375 123.866,75.384 123.866,76.291 124.025,76.45 124.025,77.45 123.925,77.55 120.975,77.55 120.925,77.5 120.925,76.425 120.8,76.425 120.3,75.8 120.25,75.75 119.475,75.75 119.35,75.625 119.35,74.875 119.375,74.85 119.375,73.875 119.5,73.75
+3v3 on L1 (SIGNAL) "+3V3_L01_P009" (solid, pour order 9): 117,67 117,65.9 117.4,65.5 120.9,65.5 121.3,65.9 121.3,67.2 122.5,67.2 123.6,66.1 124.9,66.1 125.6,66.8 125.6,67.7 125,68.3 120.8,68.3 120.3,68.8 120.3,73.3 120.08,73.52 118.12,73.52 118,73.4 118,72.2 118.3,71.9 118.3,68 118,68
+5 on L1 (SIGNAL) "+5_L01_P007" (solid, pour order 7): 117,75 116.5,74.5 116.3,74.5 115.5,73.7 115.5,72.2 115.8,71.9 117.6,71.9 117.8,72.1 117.8,75
+5 on L1 (SIGNAL) "+5_L01_P004" (solid, pour order 4): 120.9,77.9 119.6,77.9 119.2,77.5 119.2,74.1 118.9,73.8 117.3,73.8 117,74.1 117,76.7 118.75,78.45 120.9,78.45
+5 on L1 (SIGNAL) "+5_L01_P002" (solid, pour order 2): 121.2,80.5 121.2,79.1 121,79.1 120.9,79 120.9,77.9 121,77.8 122.1,77.8 122.3,78 122.3,80.5 122.2,80.6 121.3,80.6
VBUS on L1 (SIGNAL) "VBUS_L01_P001" (solid, pour order 1): 122.5,80.5 122.5,77.9 122.6,77.8 124,77.8 124.1,77.9 124.1,79.8 124.5,80.2 126.5,80.2 126.5,80.7 122.7,80.7
no net on L1 (SIGNAL) "NONET_L01_P000" (solid, pour order 0): 122.6,80.6 122.5,80.5
GND on L2 (GND) "GND_L02_P017" (solid, pour order 17): 91.825,63.4 ccw(c92.827,63.401) 92.825,62.4 129.325,62.4 ccw(c129.325,63.4) 130.325,63.4 130.325,97.9 ccw(c129.325,97.9) 129.325,98.9 92.825,98.9 ccw(c92.825,97.9) 91.825,97.9
GND on L3 (GND) "GND_L03_P018" (solid, pour order 18): 91.8,63.2 ccw(c92.802,63.201) 92.8,62.2 129.3,62.2 ccw(c129.3,63.2) 130.3,63.2 130.3,97.7 ccw(c129.3,97.7) 129.3,98.7 92.8,98.7 ccw(c92.8,97.7) 91.8,97.7

## Silkscreen, mask and mechanical layers (free items; w line width, h text height)
Mechanical 1:
  lines w0.254: 91.475,63.53 ccw(c92.745,63.53) 92.745,62.26 129.575,62.26 ccw(c129.575,63.53) 130.845,63.53 130.845,97.82 ccw(c129.575,97.82) 129.575,99.09 92.745,99.09 ccw(c92.745,97.82) 91.475,97.82 91.475,89.247 91.475,72.102 91.475,63.53

## Text inside footprints (layer, text, board x,y; h text height)
D1: Mechanical 13 "+" at 110.117,78.758 h0.5
D2: Mechanical 13 "+" at 126.292,66.117 h0.5 r90